# EAGLE board PokeRoyaleDavoPCB (EAGLE 8.6.3)
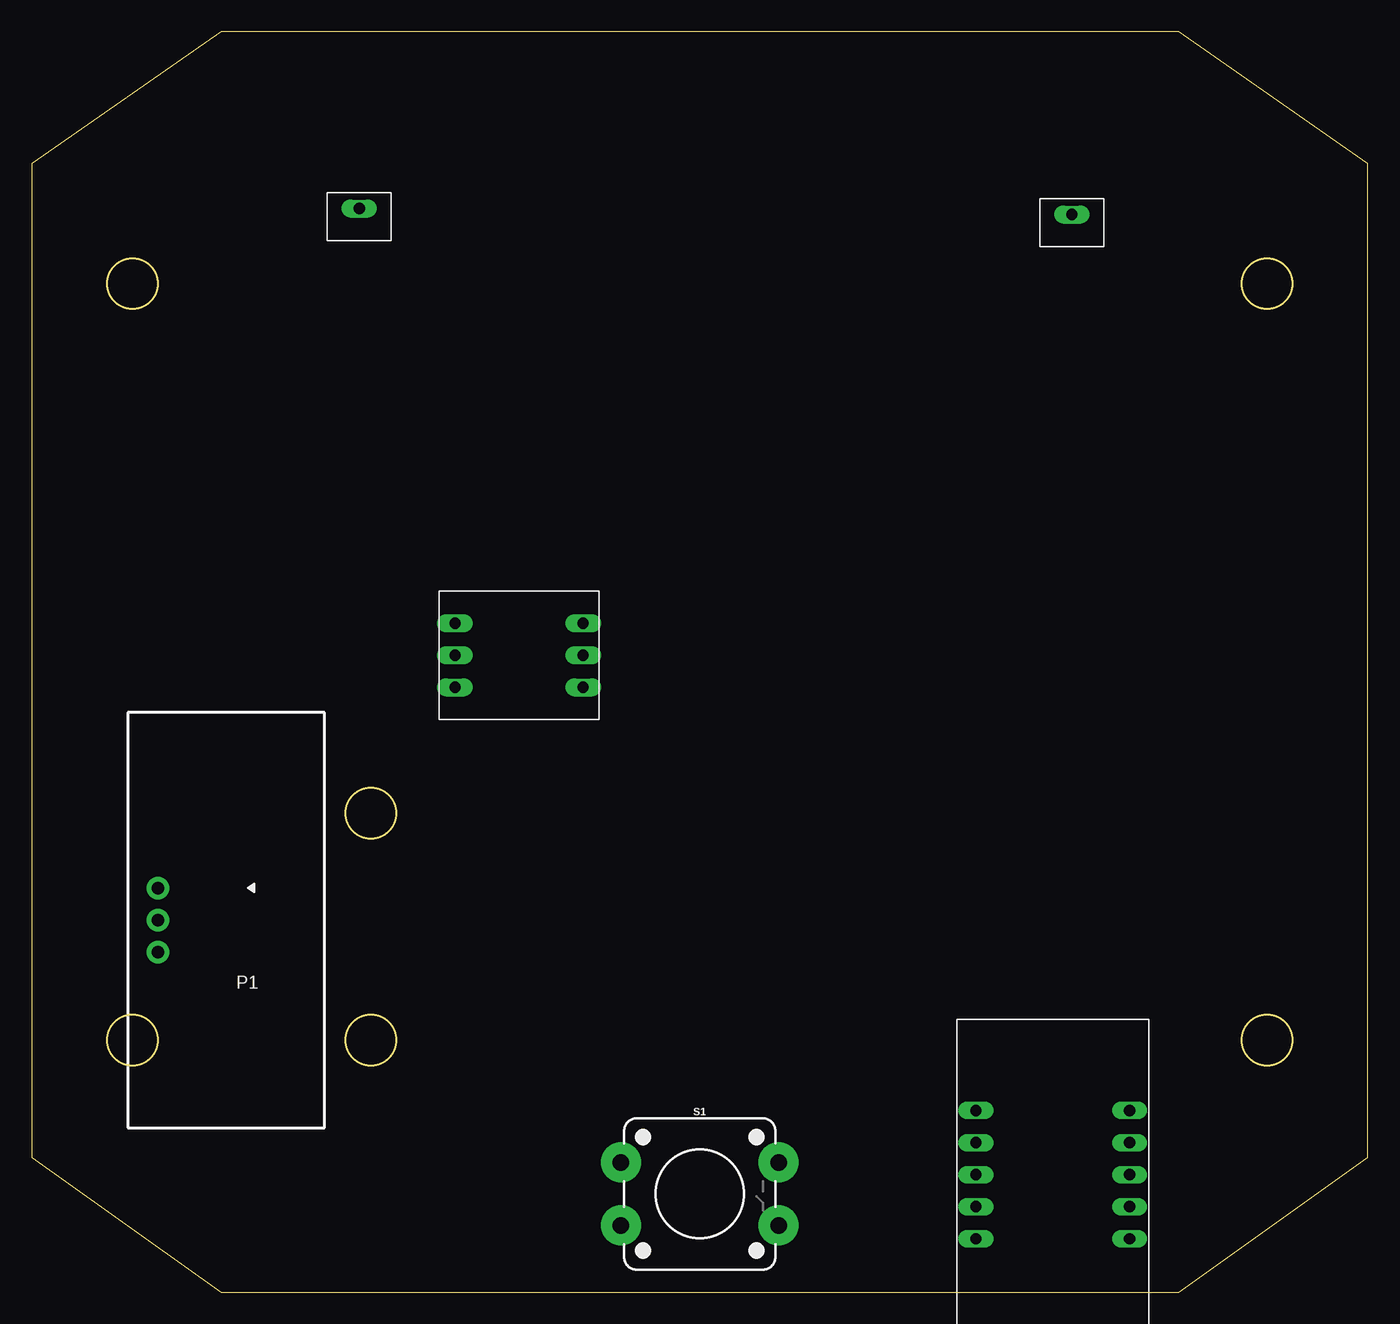
[diagram p0: board, top side]
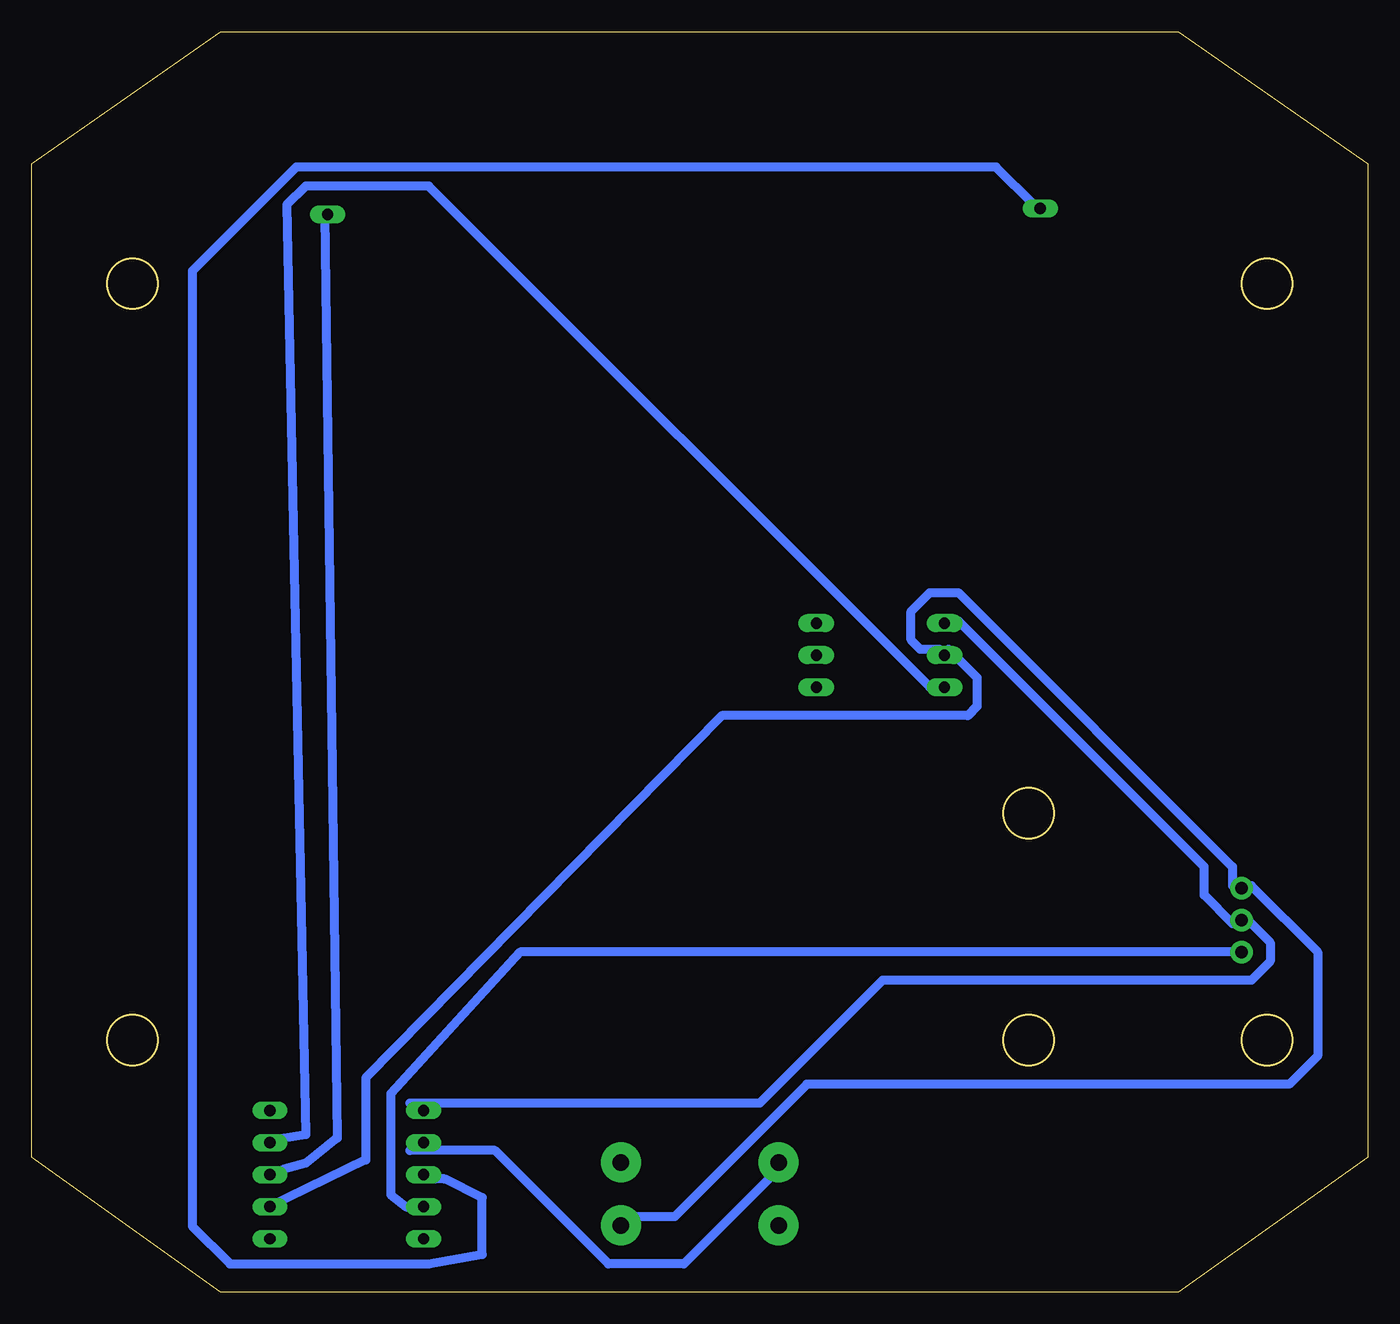
[diagram p1: board, bottom side, seen from below]

Size 106 x 100 mm. Coordinates in mm from the lower left corner, seen from the top.
Outline: 15.05,0 91,0 106,10.69 106,89.5 91,100 15.05,100 0,89.5 0,10.69 15.05,0
Outline: circle at 8,80 radius 2
Outline: circle at 98,80 radius 2
Outline: circle at 98,20 radius 2
Outline: circle at 8,20 radius 2
Outline: circle at 26.91,20 radius 2
Outline: circle at 26.91,38 radius 2
Copper layers (1*16): Top 0.035mm / dielectric 1.5mm / Bottom 0.035mm
Design rules "default *": minimum track width 0.7mm, minimum drill 0.8mm, track to track 0.8mm, track to pad 0.8mm, pad to pad 0.8mm, via to via 0.8mm, smd to smd 0.8mm, copper to edge 40mil, drill to drill 6mil, minimum pad ring 10mil, minimum via ring 8mil, stop-mask expansion 4mil, vias tented up to drill 0mil, thermal gap 10mil

## Footprints (pad centres in the part's own frame; a part is rotated, then mirrored left to right if it is on the bottom)
COMMS = drill 0.9 long: P$1 0,0
LCW-103-XX-X-S = drill 1 pad 1.778: 1 2.54,5.415; 2 0,5.415; 3 -2.54,5.415
TACTILE_SWITCH_PTH_12MM = drill 1.3 pad 3.175: 1 6.25,-2.5; 2 -6.25,-2.5; 3 6.25,2.5; 4 -6.25,2.5
NEOPIXEL = drill 0.889 pad 1.422 long: + -3.81,2.54; +1 6.35,2.54; G -3.81,0; G1 6.35,0; IN -3.81,-2.54; O 6.35,-2.54
TRINKET = drill 0.889 long: 5V 6.096,-6.096; #0 6.096,1.524; #1 6.096,-1.016; #2 6.096,-3.556; #3 -6.096,-3.556; #4 -6.096,-1.016; BAT -6.096,4.064; GND -6.096,1.524; RST -6.096,-6.096; USB 6.096,4.064

## Placement (x,y rotation side)
COMEMMIT  COMMS  [COMMS]  25.99,85.96 0 top
COMRECEIVE  COMMS  [COMMS]  82.51,85.49 0 top
P1  LCW-103-XX-X-S  [LCW-103-XX-X-S]  15.44,29.52 90 top
S1  [TACTILE_SWITCH_PTH_12MM]  53,7.8 0 top
U$1  NEOPIXEL  [NEOPIXEL]  37.4,50.53 0 top
U$2  TRINKET  [TRINKET]  81,8.32 180 top

## Library data of the parts
COMEMMIT COMRECEIVE U$1 U$2 = adafruitComponents
P1 = altered con-samtec
S1 = altered SparkFun-Switches

## Nets
N$1: S1.4 U$2.#2
N$2: P1.1 S1.1 U$1.G U$2.GND
N$3: P1.2 U$1.+ U$2.5V
N$5: U$1.IN U$2.#3
N$6: COMRECEIVE.P$1 U$2.#4
N$7: COMEMMIT.P$1 U$2.#1
N$8: P1.3 U$2.#0

## Tracks (layer width: path | path; a pad name or v marks a point on that pad's centre or on a via)
N$1
  Bottom 0.7: U$2.#2 76,11.25 69.25,11.25 60.25,2.25 54.25,2.25 46.75,9.75 S1.4
N$2
  Bottom 0.7: U$2.GND 88,6.75 87.25,6.75 79.5,10.5 79.5,17 51.25,45.75 31.75,45.75 31,46.5 31,48.75 33.25,51 U$1.G 34,51 35.5,51 36.25,51.75 36.25,54 34.75,55.5 32.5,55.5 10.75,33.75 10.75,32.25 P1.1 10,32.25 9.25,32.25 4,27 4,18.75 6.25,16.5 44.5,16.5 55,6 58.75,6 S1.1
N$3
  Bottom 0.7: U$2.5V 76,15 48.25,15 38.5,24.75 9.25,24.75 7.75,26.25 7.75,27.75 10,30 P1.2 10.75,29.25 13,31.5 13,33.75 32.5,53.25 33.25,53.25 U$1.+
N$5
  Bottom 0.7: U$2.#3 88,12 87.25,12 84.25,12.5 85.75,86.25 84.25,87.75 74.5,87.75 34.75,48 34,48 U$1.IN
N$6
  Bottom 0.7: U$2.#4 86,9.75 84.25,10.25 81.75,12.25 82.75,85.5 COMRECEIVE.P$1
N$7
  Bottom 0.7: U$2.#1 74,9 73.25,9 70.25,7.5 70.25,3 74.5,2.25 90.25,2.25 93.25,5.25 93.25,81 85,89.25 29.5,89.25 26.5,86.25 COMEMMIT.P$1
N$8
  Bottom 0.7: U$2.#0 76.25,6.75 77.5,7.75 77.5,15.75 67.25,27 10.75,27 P1.3